# Altium PCB CabinTempSenseHardware.PcbDoc
Units mil, origin at the board's own origin, x right, y up, seen from the top; angles counter-clockwise.
Board outline 1562 x 1352 mil, 2 copper layers (Top Layer, Bottom Layer); 21 components, 15 nets, 118 pads, 66 vias.
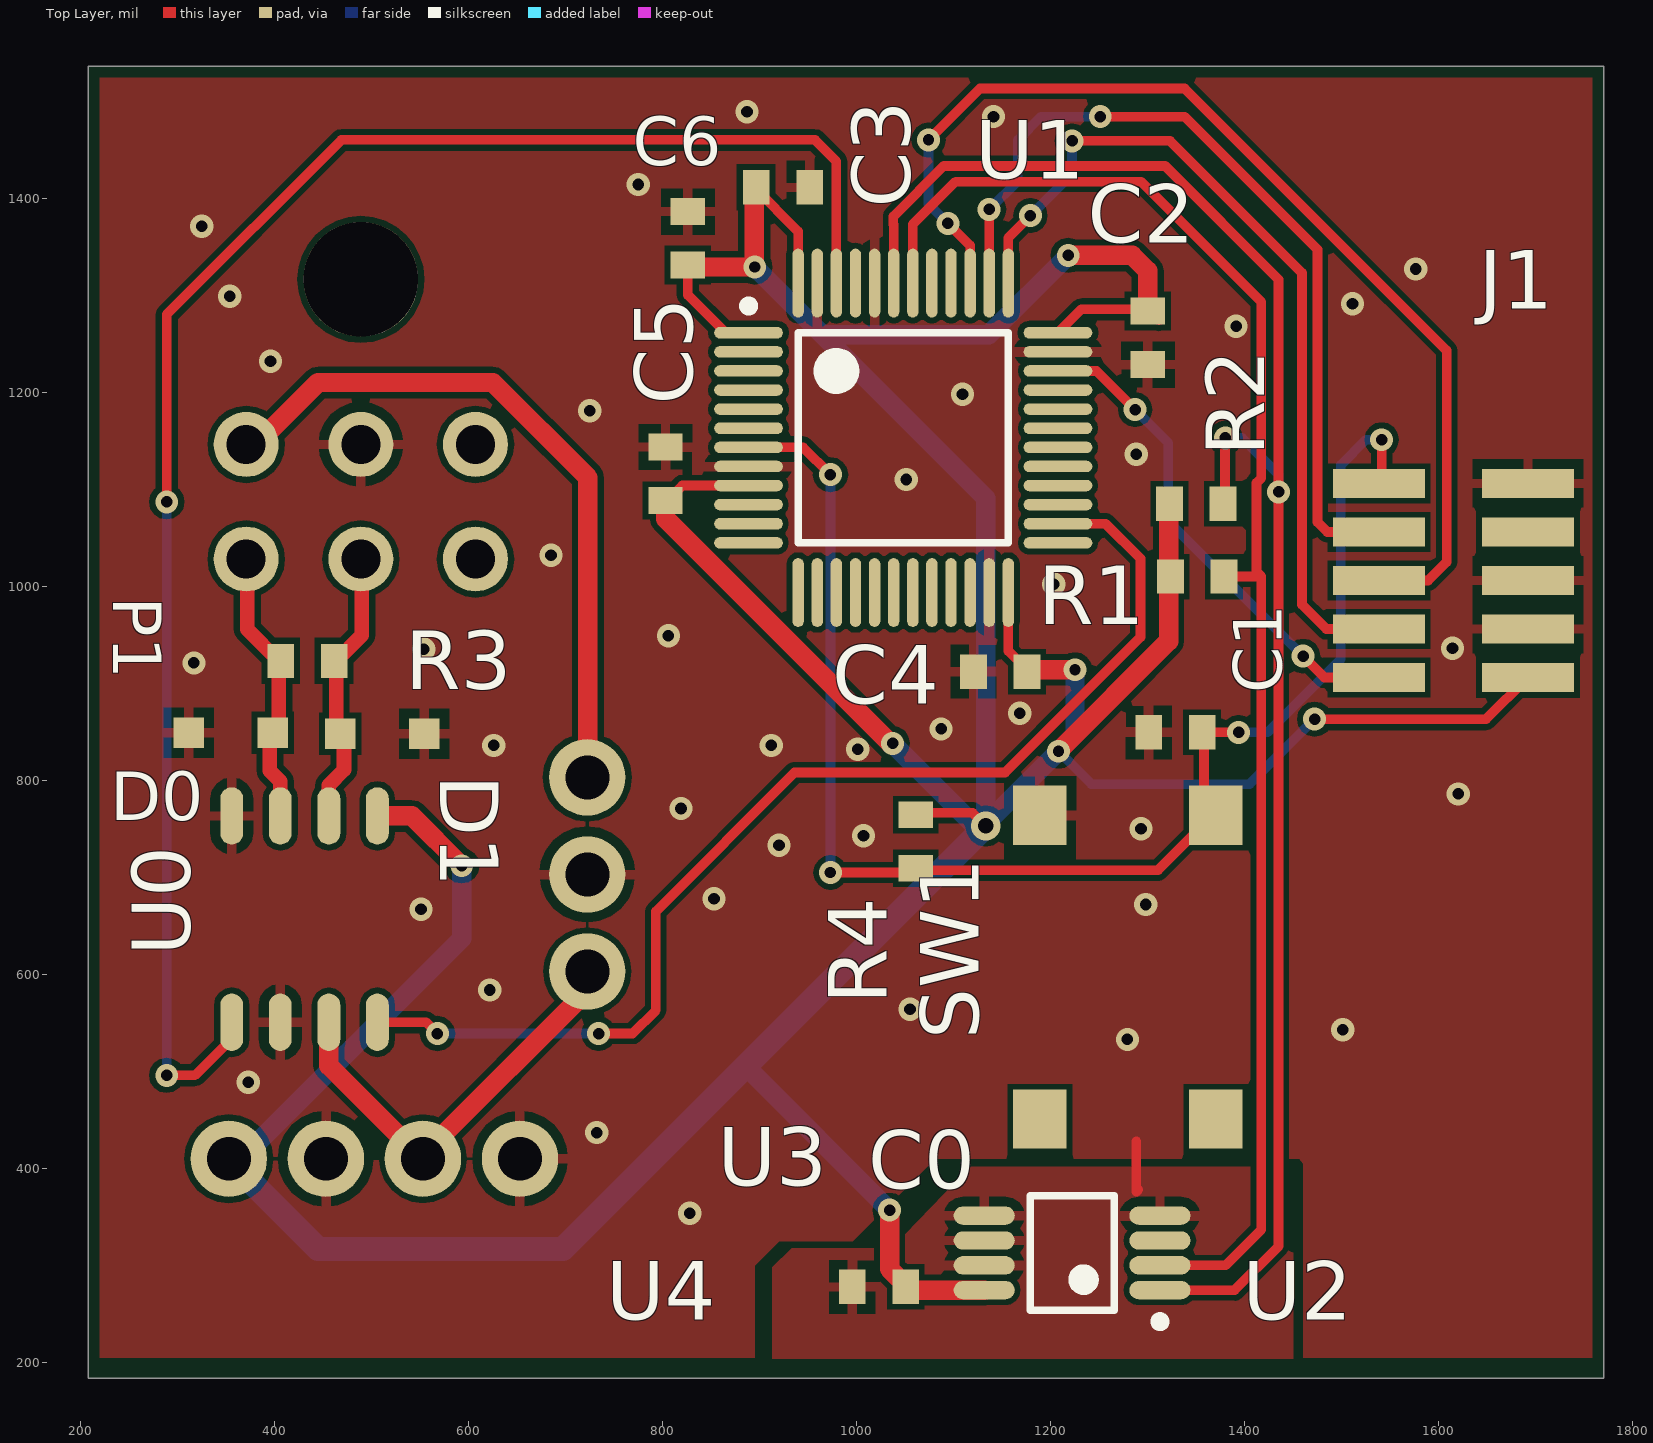
[diagram p0: Top Layer view]
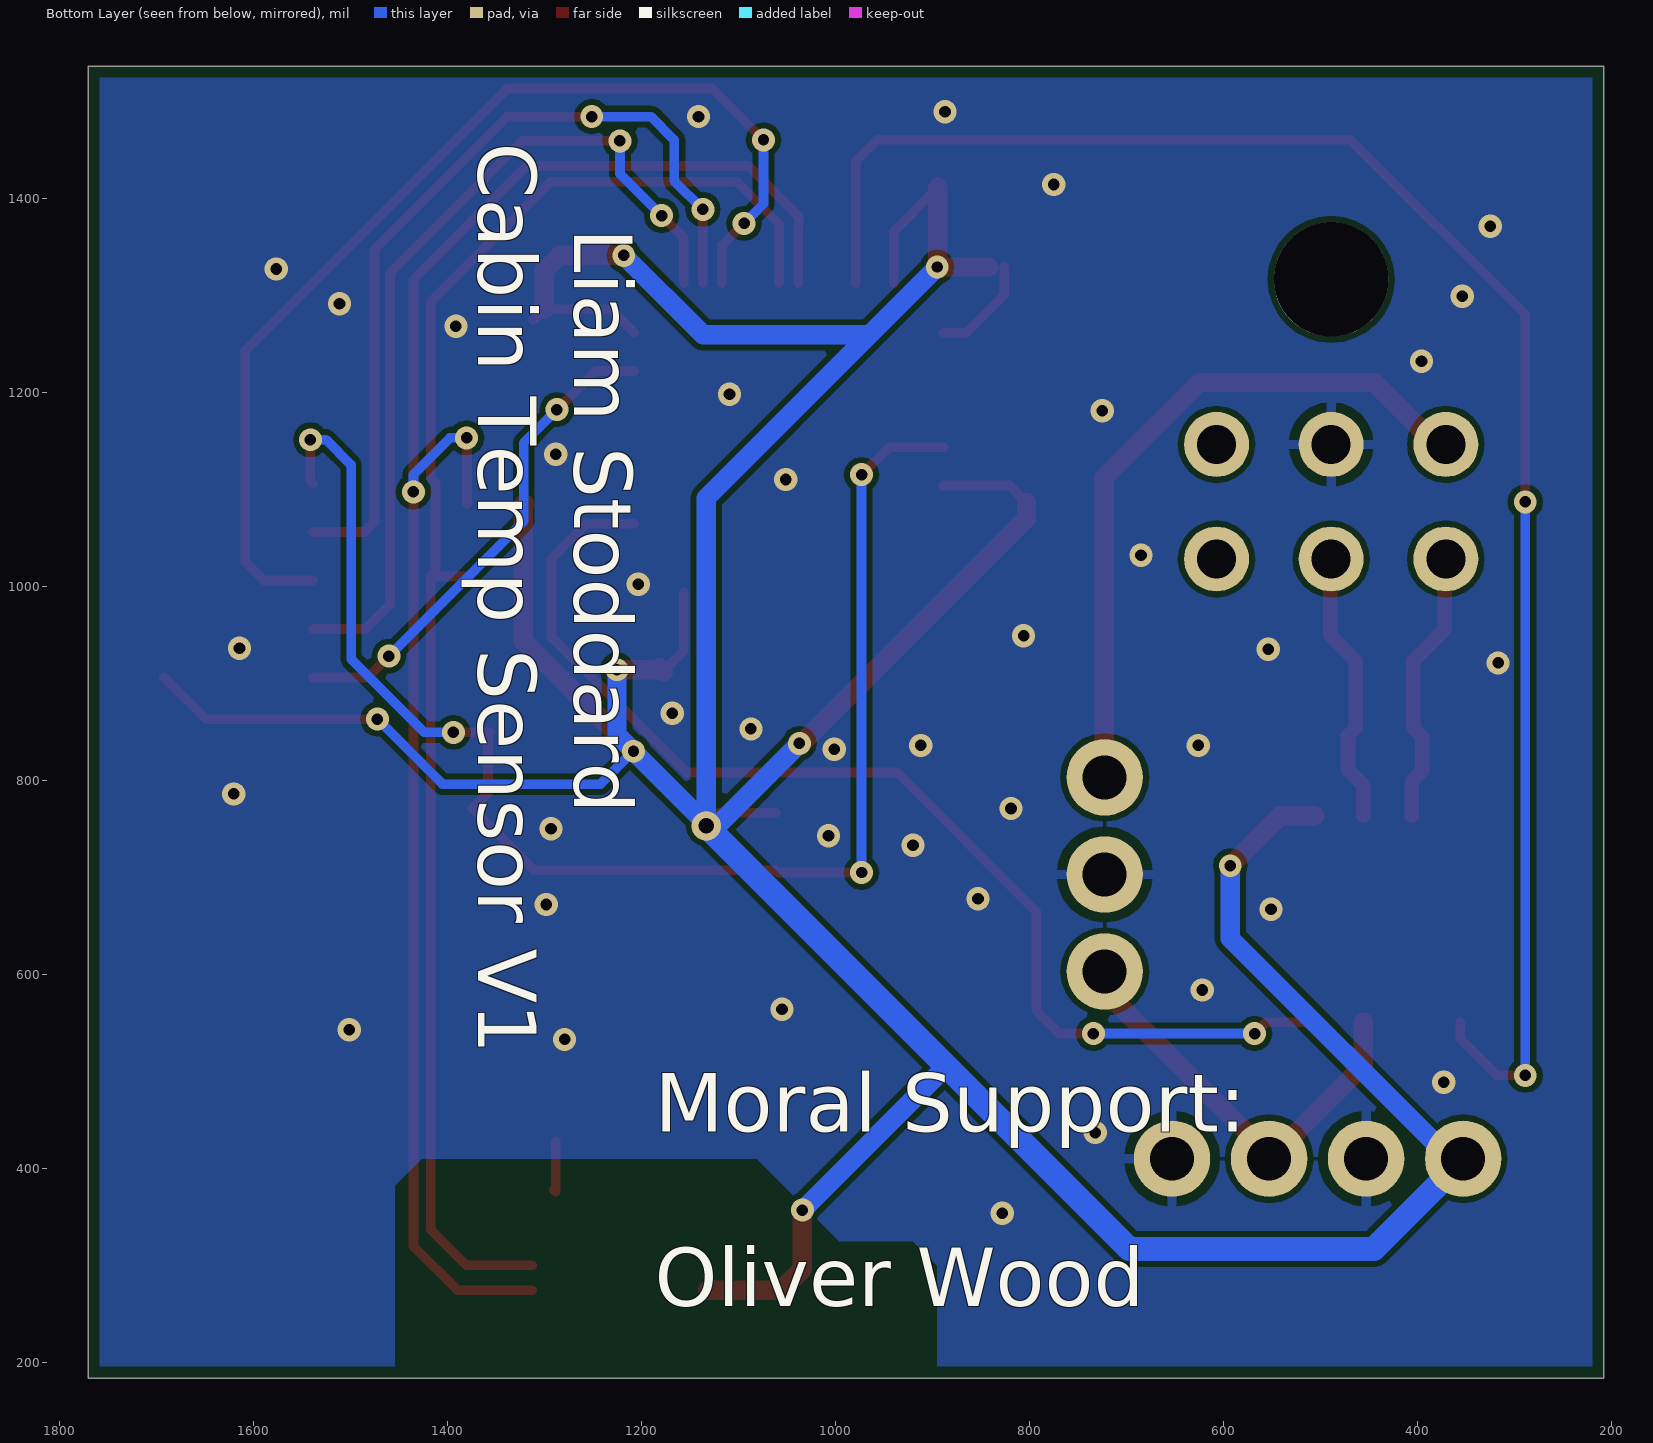
[diagram p1: Bottom Layer view, seen from below]
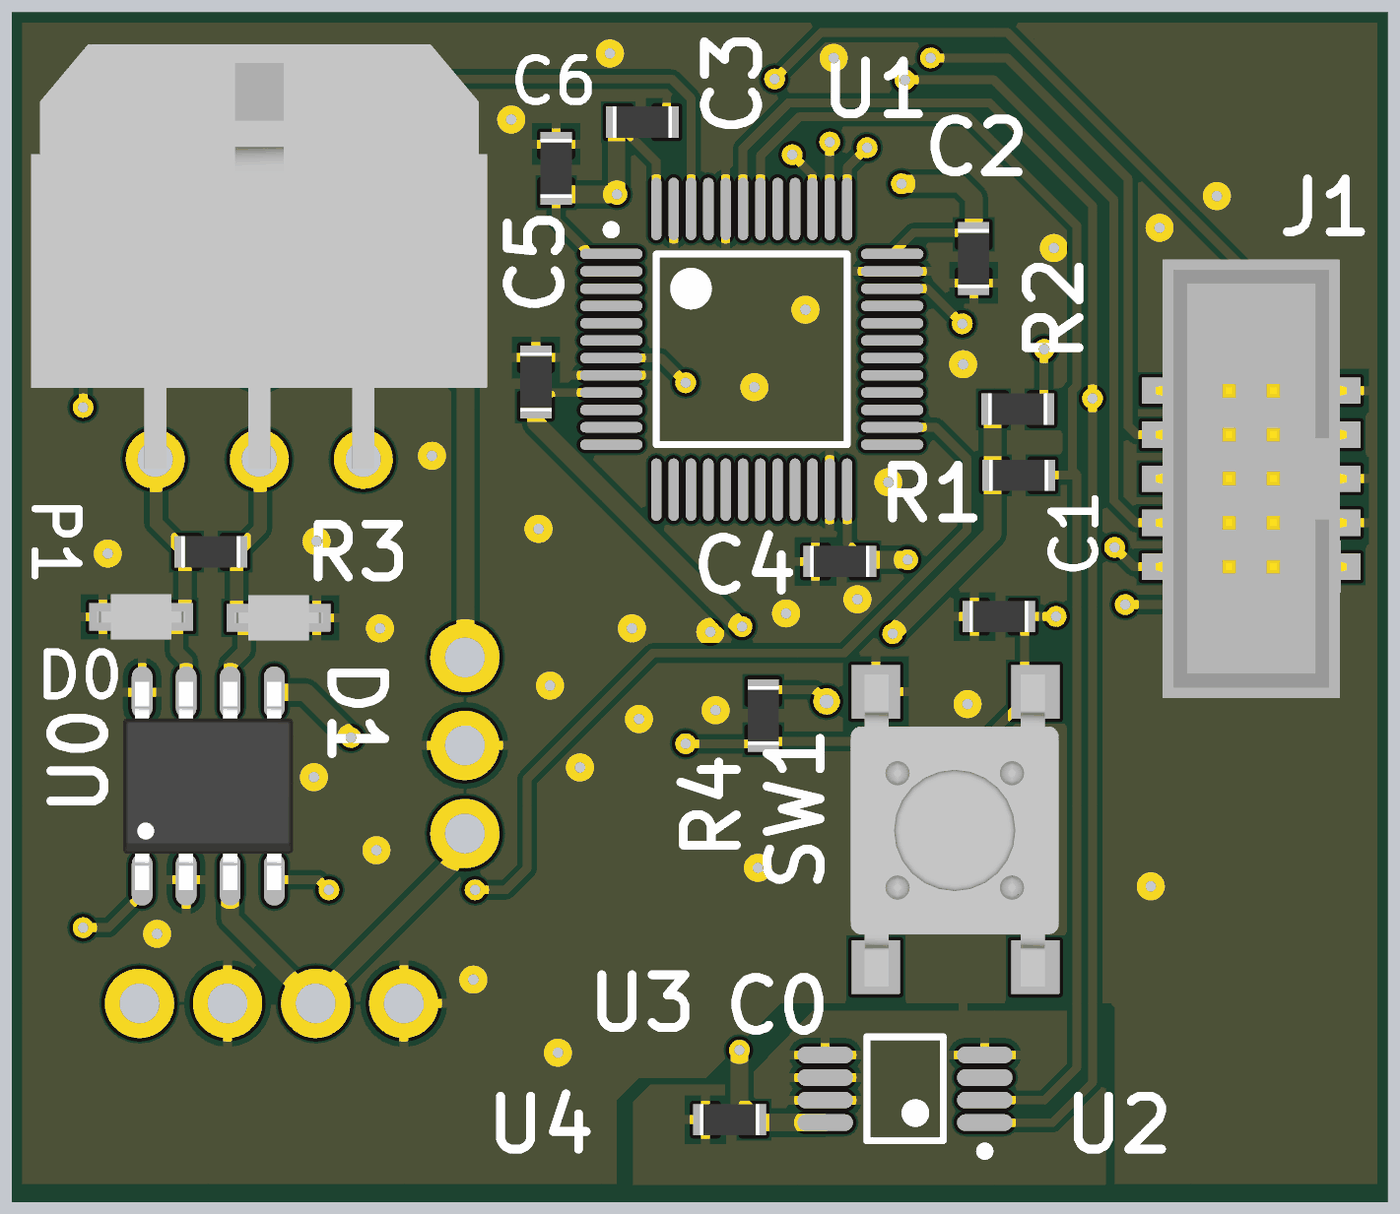
[diagram p2: 3D render of the assembled board from above, using the file's embedded part models]

## Layer stack, top to bottom
Top Solder: solder mask 0.4, Solder Resist, Dk 3.5
Top Layer: signal copper 1.4
Dielectric 1: dielectric 12.6, FR-4, Dk 4.8
Bottom Layer: signal copper 1.4
Bottom Solder: solder mask 0.4, Solder Resist, Dk 3.5

## Board outline
208,184 208,1536 489,1536 675,1536 863,1536 1770,1536 1770,858 1770,184

## Design rules (kind name [scope] priority, off if disabled: settings)
BoardOutlineClearance [All] p1: gap=11.81
Clearance [All] p1: gap=6
ComponentClearance [All] p1: gap=3.94 collisioncheckmode=3 verticalgap=10 showdistances=FALSE
DiffPairsRouting [All] p1: maxlimit=10 minlimit=10 mostfreqgap=10 toplayer_minwidth=15 toplayer_maxwidth=15 toplayer_prefwidth=15 bottomlayer_minwidth=15 bottomlayer_maxwidth=15 bottomlayer_prefwidth=15 maxuncoupledlength=500
FabricationTestPointUsage TestPointUsage [All] p1: valid=0 allowmultiple=FALSE
FabricationTestpoint Testpoint [All] p1: side=3 testpointundercomponent=TRUE minsize=40 maxsize=100 preferedsize=60 minholesize=0 maxholesize=40 preferedholesize=32 testpointgrid=1 allowsidetop=TRUE allowsidebottom=TRUE usegrid=TRUE gridtolerance=0.01
HoleSize [All] p1: absolutevalues=TRUE maxlimit=248.03 minlimit=11.81 maxpercent=80.000 minpercent=20.000
HoleToHoleClearance [All] p1: gap=17.72 allowstackedmicrovias=TRUE
MinimumAnnularRing [All] p1: minimumring=5.91
MinimumSolderMaskSliver [All] p1: minsoldermaskwidth=2.95
PlaneClearance [All] p1: clearance=19.68
PlaneConnect [All] p1: planeconnectstyle=Direct reliefexpansion=20 reliefentries=4 reliefconductorwidth=10 reliefairgap=10
PolygonConnect "GND Via" [isVia AND InNet('GND')] p1: connectstyle=Direct reliefconductorwidth=10 reliefentries=4 polygonreliefangle="90 Angle" airgapwidth=10 // GND Via Connection
PolygonConnect [All] p2: connectstyle=Relief reliefconductorwidth=10 reliefentries=4 polygonreliefangle="90 Angle" airgapwidth=9.84
RoutingVias [All] p1: holewidth=11.81 width=23.62 viastyle="Through Hole" minholewidth=11.81 minwidth=23.62 maxholewidth=248.03 maxwidth=259.84
SilkToSilkClearance [All] p1: silktosilkclearance=5.91
SilkToSolderMaskClearance SilkscreenOverComponentPads [IsPad] p1: minsilkscreentomaskgap=9.84 clearancetoexposedcopper=TRUE
SolderMaskExpansion [All] p1: expansion=3.94
UnpouredPolygon UnpouredPolygon_1 [All] p2:
Width [All] p1: maxlimit=78.74 minlimit=6 preferedwidth=9.84 minimp=50.000000 maximp=50.000000 favimp=50.000000
19 further rules are at their usual default settings.

## Classes and differential pairs
component class MCU: C1 J1 R4 SW1 U1
component class Power&CAN: C2 C3 C4 C5 C6 D0 D1 P1 R3 U0 U3 U4
component class Sensor: C0 R1 R2 U2
differential pair CAN: +CAN_P -CAN_N

## Components (designator, comment, footprint, x,y, rotation, side; value= is the part's Value field where it differs from the comment)
C0 "SCH_GENERIC_CAPACITOR_0603" PCB_GENERIC_SMD_0603 1023,278 r0 top
C1 "SCH_GENERIC_CAPACITOR_0603" PCB_GENERIC_SMD_0603 1328.47,849.47 r0 top
C2 "SCH_GENERIC_CAPACITOR_0603" PCB_GENERIC_SMD_0603 1300,1256 r90 top
C3 "SCH_GENERIC_CAPACITOR_0603" PCB_GENERIC_SMD_0603 924,1411 r180 top
C4 "SCH_GENERIC_CAPACITOR_0603" PCB_GENERIC_SMD_0603 1148,912 r0 top
C5 "SCH_GENERIC_CAPACITOR_0603" PCB_GENERIC_SMD_0603 803,1116 r270 top
C6 "SCH_GENERIC_CAPACITOR_0603" PCB_GENERIC_SMD_0603 826,1358.53 r270 top
D0 "Bourns TVS Diode 3.3V SOD323" "TVS Diode SOD-323" 355,849 r180 top
D1 "Bourns TVS Diode 3.3V SOD323" "TVS Diode SOD-323" 511,848 r0 top
J1 "SMT, shrouded" CONN-50mil-10POS-SMD 1615,1006 r180 top
P1 "SCH_MLX_MICROFIT_3X2" PCB_MLX_MICROFIT_3X2 489,1245 r0 top
R1 "SCH_GENERIC_RESISTOR_0603" PCB_GENERIC_SMD_0603 1351,1010 r180 top
R2 "SCH_GENERIC_RESISTOR_0603" PCB_GENERIC_SMD_0603 1350,1085 r180 top
R3 "SCH_GENERIC_RESISTOR_0603" PCB_GENERIC_SMD_0603 434,923 r180 top
R4 "SCH_GENERIC_RESISTOR_0603" PCB_GENERIC_SMD_0603 1061,737 r90 top
SW1 "Tactile Switch" "C&K 4 pin Tactile Switch" 1279.45,607.5 r270 top
U0 "MCP2562" SOIC127P600X175-8N 431,657 r90 top
U1 "STM32F102C4T6A" STM-LQFP48_N 1048,1153 r0 top
U2 "I2C Temperature Sensor" "SENSOR TEMP I2C/SMBUS 8MSOP" 1222,313 r180 top
U3 "R78E-1.0 DC/DC" R78-1.0 811,703 r270 top
U4 "RECOM RO Series" "RECOM RO Series 1W DCDC" 503,341.89 r180 top

## Footprints (in the part's own frame and the unit in brackets; to place one, negate y for a bottom-side part, rotate by r counter-clockwise, add the part's x,y. Pads: shape width x height; smd on the part's side, far side on the other; paste and mask are expansions set on the pad)
"C&K 4 pin Tactile Switch" [mm] "4 Pin Tactile Switch, SMT"
  rect 1.55x1.4 smd mask+0.1: 1(-3.975,2.3)
  rect 1.55x1.4 smd: 2(3.975,2.3) 3(-3.975,-2.3) 4(3.975,-2.3)
  body extent -4.47,-3.02 4.53,2.98, height 5
CONN-50mil-10POS-SMD [mm] "50mil 10POS 2ROW SMT HEADER"
  rect 2.4x0.76 smd: 1(-1.95,2.54) 2(1.95,2.54) 3(-1.95,1.27) 4(1.95,1.27) 5(-1.95,0) 6(1.95,0) 7(-1.95,-1.27) 8(1.95,-1.27) 9(-1.95,-2.54) 10(1.95,-2.54)
  body extent -2.75,-6.33 2.75,6.32, height 5.57
PCB_GENERIC_SMD_0603 [mm]
  rect 0.7x0.9 smd: 1(-0.7,0) 2(0.7,0)
  body extent -0.85,-0.45 0.85,0.45, height 0.55
PCB_MLX_MICROFIT_3X2 [mm]
  round 1.7 hole 1.02: 1(-3,-2.51) 2(0,-2.51) 3(3,-2.51) 4(-3,-5.51) 5(0,-5.51) 6(3,-5.51)
  round 3 hole 3 unplated: ""(0,1.81)
  body extent -6.58,-5.78 6.57,6.46, height 8.83
R78-1.0 [mm]
  round 2 hole 1.15: 1(-2.54,-2.25) 2(0,-2.25) 3(2.54,-2.25)
  body extent -5.8,-4.25 5.8,4.25, height 10.4
"RECOM RO Series 1W DCDC" [mm] "RO-053.3S"
  round 2 hole 1.15: 1(-3.81,-1.73) 2(-1.27,-1.73) 3(1.27,-1.73) 4(3.81,-1.73)
  body extent -5.75,-3 5.75,3, height 10
"SENSOR TEMP I2C/SMBUS 8MSOP" [mm] "Temperature Sensor Digital, Local -40°C ~ 125°C 10 b 8-MSOP, Digikey; MCP9808T-E/MSCT-ND Mfg; MCP9808T-E/MS"
  oval 1.6x0.48 smd: 1(-2.3,0.975) 2(-2.3,0.325) 3(-2.3,-0.325) 4(-2.3,-0.975) 5(2.3,-0.975) 6(2.3,-0.325) 7(2.3,0.325) 8(2.3,0.975)
  silkscreen extent -2.43,-1.5 1.1,1.92, body extent -1.5,-1.5 1.5,1.5, height 1.1
SOIC127P600X175-8N [mm] "SOIC, 8-Leads, Body 4.90x3.90mm, Pitch 1.27mm, IPC Medium Density"
  oval 1.5x0.6 smd: 1(-2.7,1.905) 2(-2.7,0.635) 3(-2.7,-0.635) 4(-2.7,-1.905) 5(2.7,-1.905) 6(2.7,-0.635) 7(2.7,0.635) 8(2.7,1.905)
  body extent -3,-2.45 3,2.45, height 1.75
STM-LQFP48_N [mm] "QFP, 48-Leads, Body 7x7mm, Pitch 0.5mm, IPC Medium Density"
  oval 1.8x0.3 smd: 1(-4.05,2.75) 2(-4.05,2.25) 3(-4.05,1.75) 4(-4.05,1.25) 5(-4.05,0.75) 6(-4.05,0.25) 7(-4.05,-0.25) 8(-4.05,-0.75) 9(-4.05,-1.25) 10(-4.05,-1.75) 11(-4.05,-2.25) 12(-4.05,-2.75) 25(4.05,-2.75) 26(4.05,-2.25) 27(4.05,-1.75) 28(4.05,-1.25) 29(4.05,-0.75) 30(4.05,-0.25) 31(4.05,0.25) 32(4.05,0.75) 33(4.05,1.25) 34(4.05,1.75) 35(4.05,2.25) 36(4.05,2.75)
  oval 0.3x1.8 smd: 13(-2.75,-4.05) 14(-2.25,-4.05) 15(-1.75,-4.05) 16(-1.25,-4.05) 17(-0.75,-4.05) 18(-0.25,-4.05) 19(0.25,-4.05) 20(0.75,-4.05) 21(1.25,-4.05) 22(1.75,-4.05) 23(2.25,-4.05) 24(2.75,-4.05) 37(2.75,4.05) 38(2.25,4.05) 39(1.75,4.05) 40(1.25,4.05) 41(0.75,4.05) 42(0.25,4.05) 43(-0.25,4.05) 44(-0.75,4.05) 45(-1.25,4.05) 46(-1.75,4.05) 47(-2.25,4.05) 48(-2.75,4.05)
  silkscreen extent -4.17,-2.75 2.75,3.57, body extent -3.5,-3.5 3.5,3.5, height 1.6
"TVS Diode SOD-323" [mm]
  rect 0.8x0.8 smd: 1(-1.1,0) 2(1.1,0)
  body extent -1.27,-0.65 1.27,0.65, height 1.04

## Part data
C0 C1 C2 C3 C4 C5 C6: "Generic SMD capacitor 0603"
D0 D1: "TVS DIODE 3.3VWM 10.9VC SOD323"
J1: library part "conn_0.050\"_cortexM", "ARM Cortex-M 10pin connector,shrouded,SMT"
R1 R2 R3 R4: "Generic SMD resistor 0603"
SW1: library part "C&K Tactile Switch"
U0: "1/1 Transceiver Full CAN 8-SOIC"
U1: "ARM Cortex-M3 32-bit MCU, 16 KB Flash, 4 KB Internal RAM, 37 I/Os, 48-pin LQFP, -40 to 85 degC, Tray"
U2: library part "Temperature Sensor Digital, Local -40°C ~ 125°C 10 b 8-MSOP, Digikey; MCP9808T-E/MSCT-ND Mfg; MCP9808T-E/MS"
U3: library part R78E-1.0
U4: library part "RECOM RO Series DCDC Converter"

## Via types
v1: diameter 24, hole 12, Top Layer to Bottom Layer, 39 vias
v2: diameter 23.62, hole 11.81, Top Layer to Bottom Layer, 26 vias
v3: diameter 30, hole 16, Top Layer to Bottom Layer, 1 vias

## Nets (pads, with @x,y where several pads share a name; then routed paths per layer and width w, separated by ;. In a path a pad name is that pad's centre, name@x,y a point inside that pad or via, vN(x,y) a via of type N, cw(c..) or ccw(c..) an arc to the next point about the centre after c; other vN are vias at no path point)
3V3: C0.2 C2.2 C3.2 C4.2 C5.2 C6.2 J1.1 R1.2 R2.2 R4.2 U0.5 U1.1 U1.9 U1.24 U1.36 U1.48 U2.8 U4.4 | length 5282.4
  Top Layer w10: C5.2@803,1086.47 820.32,1103.79 U1.9 ; C6.2@826,1329 826,1300 864.73,1261.27 U1.1 ; C3.2@894.47,1411 939.73,1365.74 U1.48 ; R4.2@1061,766.53 1119.47,766.53 v3(1133,753) ; U1.24 1156.27,933.26 C4.2@1177.53,912 ; U1.36 1231.71,1285.53 1300,1285.53 C2.2@1311.53,1274 ; v2(1472,863) 1648.77,863 J1.1
  Top Layer w20: U0.5 541.7,763.3 v2(593,712) ; C5.2@803,1086.47 803,1069.78 1034.78,838 v2(1037,838) ; C6.2@842,1329 v2(895,1329) 894.47,1329.53 C3.2@894.47,1411 ; v2(1034,357) 1034,296.53 1055.91,274.61 U2.8 ; C4.2@1177.53,912 1181.53,916 1183.53,914 v2(1225,914) ; v2(1208,830) 1321.47,943.47 1321.47,1084 R2.2@1320.47,1085 ; v2(1218,1341) 1284,1341 1300,1325 C2.2@1300,1285.53
  Bottom Layer w10: v2(1208,830) 1242,796 1405,796 v2(1472,863)
  Bottom Layer w20: U4.4@359,403 593,637 v2(593,712) ; 884,504 887,504 v2(1034,357) ; v2(895,1329) 965,1259 ; v2(1037,838) 1122,753 v3(1133,753) v3@1133,755 ; v2(1218,1341) 1136,1259 965,1259 ; v2(1225,914) 1225,847 v2(1208,830) v3@1133,755 ; 965,1259 1133,1091 v3@1133,755
  Bottom Layer w25: U4.4@359,403 445,317 697,317 884,504 v3(1133,753)
5V: U0.3 U3.3 U4.2 | length 486.7
  Top Layer w20: U0.3 456,506 559,403 559,420 724,585 U3.3@724,631
12V: P1.1 U3.1 | length 703.4
  Top Layer w20: P1.1@371.89,1136.92 444.97,1210 625,1210 723,1112 723,832 U3.1@724,831
CAN_N: D1.1 P1.5 R3.1 U0.6 | length 276.4
  Top Layer w15: U0.6 456,795 471.69,810.69 471.69,846 463.53,854.17 463.53,923 490,949.47 P1.5@490,1018.81
CAN_P: D0.1 P1.4 R3.2 U0.7 | length 277.2
  Top Layer w15: P1.4@371.89,1018.81 371.89,955.58 404.47,923 404.47,854.17 395.31,845 395.31,809.69 406,799 U0.7
CAN_RX: U0.4 U1.26 | length 1201.2
  Top Layer w10: U0.4 556.3,550.7 v2(568,539) ; v2(734,539) 768.94,539 793,563.06 793,665 936,808 1153,808 1292.47,947.47 1292.47,1028.53 1256.58,1064.42 U1.26
  Bottom Layer w10: v2(568,539) v2(734,539)
CAN_TX: U0.1 U1.46 | length 1782.7
  Top Layer w10: v2(289,496) 318,496 356,534 U0.1 ; v2(289,1087) 289,1280 469,1460 957,1460 979.1,1437.9 U1.46
  Bottom Layer w10: v2(289,496) v2(289,1087)
GND: C0.1 C1.1 C2.1 C3.1 C4.1 C5.1 C6.1 D0.2 D1.2 J1.3 J1.5 J1.9 P1.2 SW1.3 U0.2 U0.8 U1.8 U1.23 U1.35 U1.44 U1.47 U2.4 U2.5 U2.6 U2.7 U3.2 U4.1 U4.3 | length 54.9
  Top Layer w9.84: 1288,428 1288,375.94 1290,377.94
  other v1: 828,354 732,437 373,489 1279,533 1501,543 1055,564 622,584 551,667 1298,672 853,678 920,733 1007,743 1293,750 819,771 1620,786 1001,832 626,836 912,836 1087,853 1168,869 317,921 554,935 1614,936 806,949 1203,1002 685,1032 1051,1110 1288,1136 725,1181 1109,1198 396,1232 1391,1268 1511,1291 354,1299 1576,1327 325,1371 775,1414 1141,1484 887,1489
NetJ1_2: J1.2 U1.34 | length 509.1
  Top Layer w10: U1.34 1247.1,1221.9 v2(1287,1182) ; v2(1460,928) 1482,906 J1.2
  Bottom Layer w10: v2(1287,1182) 1321,1148 1321,1067 v2(1460,928)
NetJ1_4: J1.4 U1.37 | length 898.7
  Top Layer w10: U1.37 1156.27,1359.27 v2(1179,1382) ; v2(1222,1459) 1323,1459 1459,1323 1459,981 1484,956 J1.4
  Bottom Layer w10: v2(1179,1382) 1222,1425 v2(1222,1459)
NetJ1_6: J1.6 U1.39 | length 1128.8
  Top Layer w10: v2(1074,1460) 1127,1513 1338,1513 1608,1243 1608,1025 1589,1006 J1.6 ; v2(1094,1374) 1116.9,1351.1 U1.39
  Bottom Layer w10: v2(1074,1460) 1074,1394 v2(1094,1374)
NetJ1_8: J1.8 U1.38 | length 883.8
  Top Layer w10: U1.38 v2(1136.58,1388.42) ; v2(1251,1484) 1338,1484 1475,1347 1475,1066 1485,1056 J1.8
  Bottom Layer w10: v2(1136.58,1388.42) 1166,1417.83 1166,1460 1190,1484 v2(1251,1484)
NetR1_1: R1.1 U1.42 U2.2 | length 1605.4
  Top Layer w9.84: U2.2 1380.2,300.2
  Top Layer w10: U1.42 1057.84,1372.84 ; 1058.16,1372.84 1058.16,1373.16 1102,1417 1293,1417 1417,1293 1417,1111.64 1412,1106.64 1412,1015 1417,1010 ; 1380.2,300.2 1417,337 1417,1010 ; R1.1@1380.53,1010 1417,1010
NetR2_1: R2.1 U1.43 U2.1 | length 1829.5
  Top Layer w9.84: U2.1 1389.61,274.61
  Top Layer w10: 1037.84,1372.84 1037.84,1381.13 1089.72,1433 1318,1433 1434.81,1316.19 v2(1434.81,1097.19) 1434.81,319.81 1389.61,274.61 ; U1.43 1038.16,1372.84 ; R2.1@1379.53,1085 1379.53,1152.53 v2(1380,1153)
  Bottom Layer w10: v2(1380,1153) 1397,1153 1434.81,1115.19 v2(1434.81,1097.19)
NRST: C1.2 J1.10 R4.1 SW1.1 U1.7 | length 1492.9
  Top Layer w10: U1.7 944.84,1143.16 v2(973,1115) ; v2(973,705) 1058.53,705 1061,707.47 1310.57,707.47 1374.1,771 1358,787.1 C1.2@1358,849.47 ; C1.2 v2(1393.53,849.47) ; J1.10 1541,1108.77 v2(1541,1151)
  Bottom Layer w10: v2(973,705) v2(973,1115) ; v2(1393.53,849.47) 1423.47,849.47 1499,925 1499,1125 1525,1151 v2(1541,1151)
pads on no net: J1.7 P1. P1.3 P1.6 SW1.2 SW1.4 U1.2 U1.3 U1.4 U1.5 U1.6 U1.10 U1.11 U1.12 U1.13 U1.14 U1.15 U1.16 U1.17 U1.18 U1.19 U1.20 U1.21 U1.22 U1.25 U1.27 U1.28 U1.29 U1.30 U1.31 U1.32 U1.33 U1.40 U1.41 U1.45 U2.3

## Polygon pours and split planes (outlines as drawn)
GND on Top Layer "GND top sensor" (solid, pour order 18): 1450,212 1450,402 1187,402 1117,402 1036.61,318 933,318 913,298 913,204 1335,204 1442,204 1450,204
GND on Top Layer "GND top" (solid, pour order 26): 215,1525 1765,1525 1765,206 1766,205 1460,205 1460,405 1456,410 1453,410 1449,410 1091,410 1081,410 1001,330 996,325 920,325 895,300 895,205 216,205 215,204
GND on Bottom Layer "GND bottom" (solid, pour order 28): 208,1536 208,184 895,184 895,298 895,300 920,325 997,325 997,326 1081,410 1426,410 1454,382 1454,195 1769,195 1769,1536

## Silkscreen, mask and mechanical layers (free items; w line width, h text height)
Bottom Overlay:
  text "Cabin Temp Sensor V1" at 1368,1457 h60 r90
  text "Liam Stoddard" at 1269,1369 h60 r90
  text "Moral Support:  /  / Oliver Wood" at 1186,258 h60
Mechanical 1:
  lines w0.5: 208,184 208,1536 1770,1536 1770,184 208,184